# Altium PCB main_pcb.PcbDoc
Units mm, origin at the board's own origin, x right, y up, seen from the top; angles counter-clockwise.
Board outline 20 x 50 mm, 2 copper layers (Top Layer, Bottom Layer); 45 components, 28 nets, 164 pads, 32 vias.
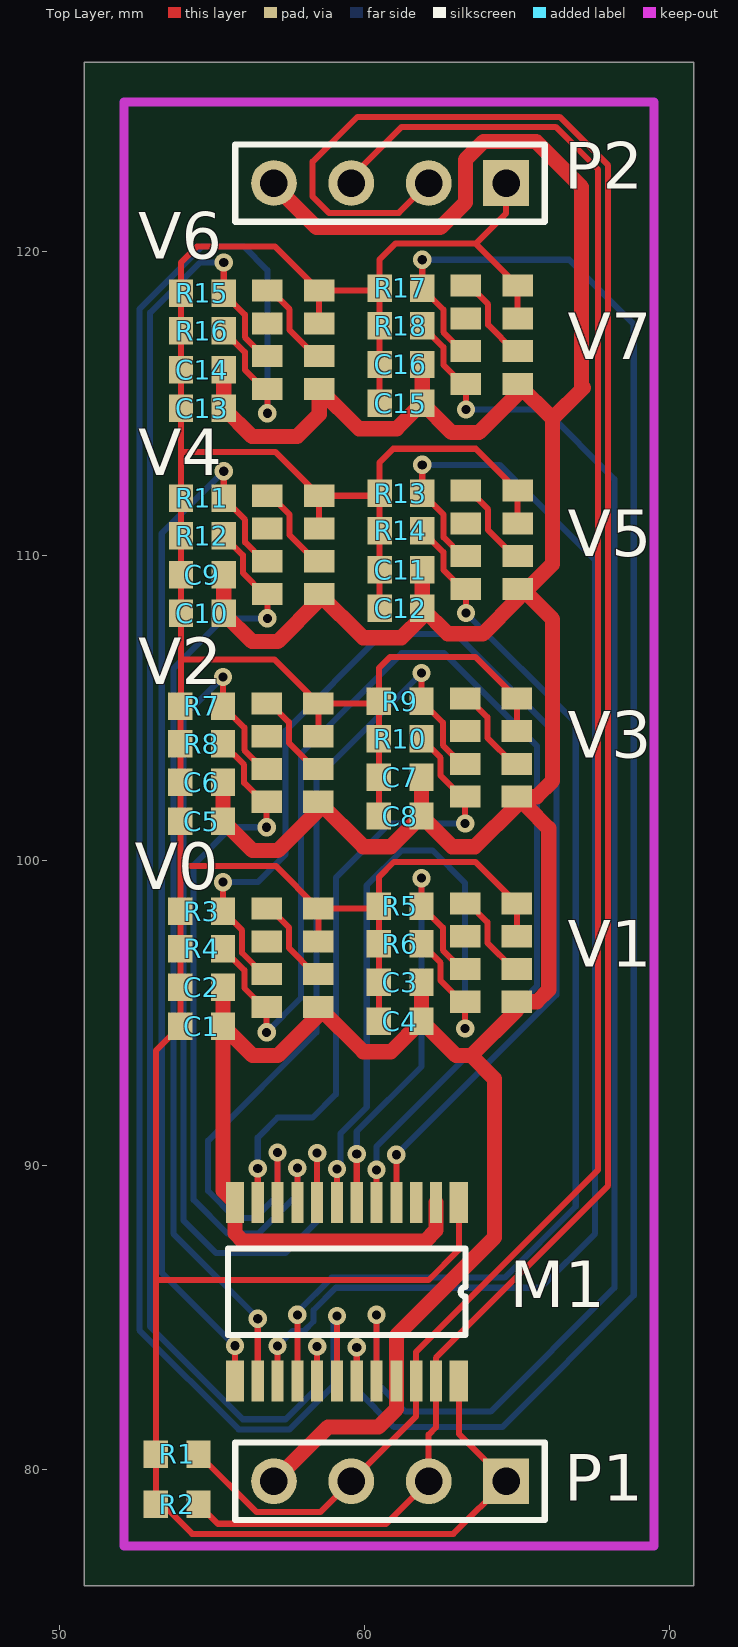
[diagram p0: Top Layer view]
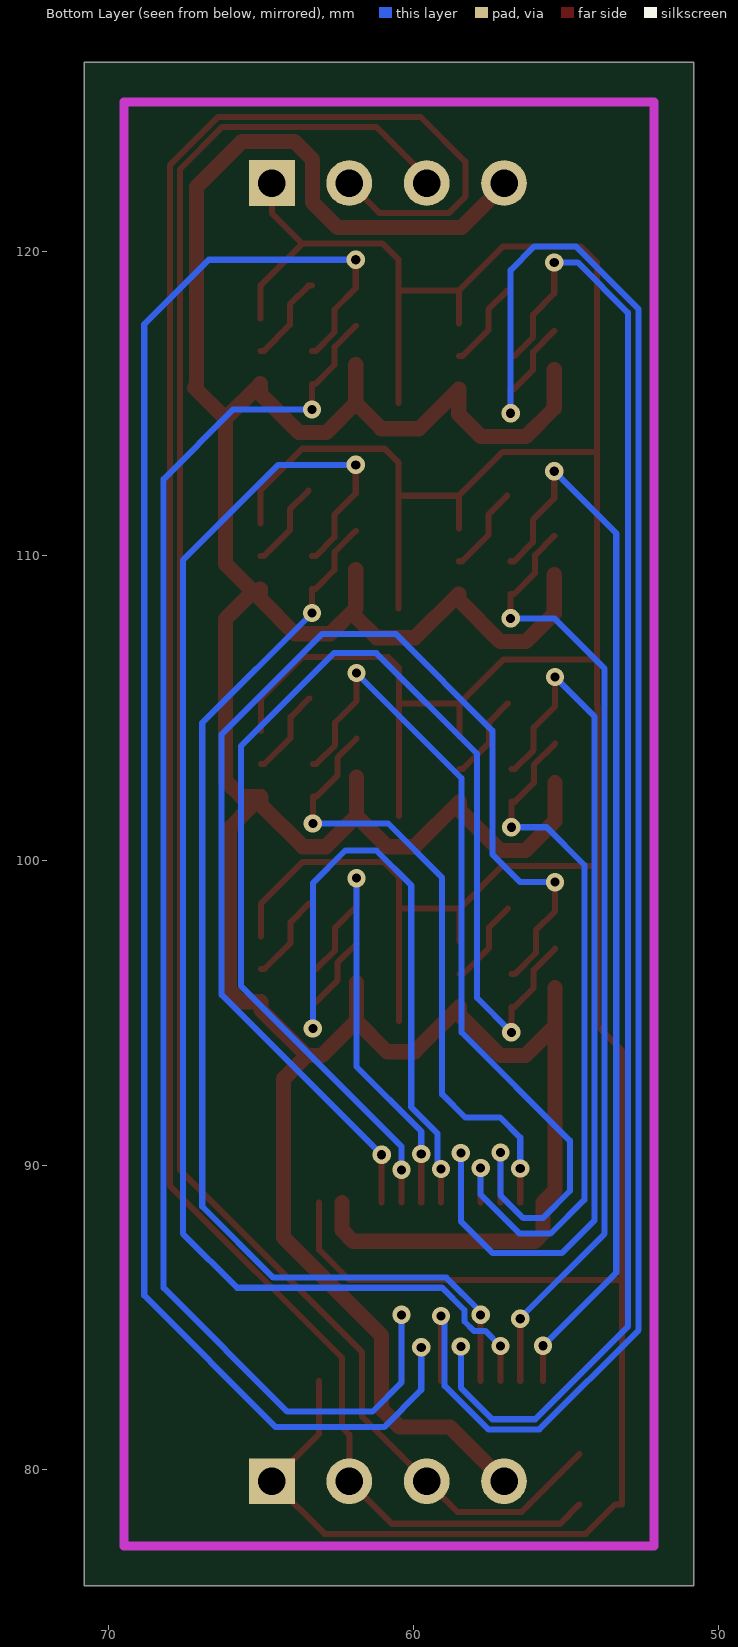
[diagram p1: Bottom Layer view, seen from below]

## Layer stack, top to bottom
Top Solder: solder mask 0.0102, Solder Resist, Dk 3.5
Top Layer: signal copper 0.0356
Dielectric 1: dielectric 0.32, FR-4, Dk 4.8
Bottom Layer: signal copper 0.0356
Bottom Solder: solder mask 0.0102, Solder Resist, Dk 3.5

## Board outline
50.8,76.2 70.8,76.2 70.8,126.2 50.8,126.2

## Design rules (kind name [scope] priority, off if disabled: settings)
Clearance [All] p1: gap=0.13
FabricationTestPointUsage TestPointUsage [All] p1: valid=0 allowmultiple=FALSE
FabricationTestpoint Testpoint [All] p1: side=3 testpointundercomponent=TRUE minsize=1.016 maxsize=2.54 preferedsize=1.524 minholesize=0 maxholesize=1.016 preferedholesize=0.813 testpointgrid=0.025 allowsidetop=TRUE allowsidebottom=TRUE usegrid=TRUE gridtolerance=0
HoleSize [All] p1: absolutevalues=TRUE maxlimit=3.9 minlimit=0.2 maxpercent=80.000 minpercent=20.000
HoleToHoleClearance [All] p1: gap=0.3 allowstackedmicrovias=TRUE
MinimumSolderMaskSliver [All] p1: minsoldermaskwidth=0.1
PlaneConnect [All] p1: planeconnectstyle=Relief reliefexpansion=0.5 reliefentries=4 reliefconductorwidth=0.4 reliefairgap=0.4
PolygonConnect [All] p1: connectstyle=Relief reliefconductorwidth=0.4 reliefentries=4 polygonreliefangle="90 Angle" airgapwidth=0.4
RoutingVias [All] p1: holewidth=0.3 width=0.6 viastyle="Through Hole" minholewidth=0.3 minwidth=0.6 maxholewidth=0.3 maxwidth=0.6
SilkToBoardRegionClearance UnpouredPolygon [All] p2:
SilkToSilkClearance [All] p1: silktosilkclearance=0
SilkToSolderMaskClearance SilkscreenOverComponentPads [IsPad] p1: minsilkscreentomaskgap=0 clearancetoexposedcopper=TRUE
SolderMaskExpansion [All] p1: expansion=-0.01
Width Power_Width [(InNet('5V') OR InNet('3V3') OR InNet('VCC') OR InNet('GND'))] p1: maxlimit=1 minlimit=0.4 preferedwidth=0.5 minimp=50.000000 maximp=50.000000 favimp=50.000000
Width [All] p2: maxlimit=0.2 minlimit=0.2 preferedwidth=0.2 minimp=50.000000 maximp=50.000000 favimp=50.000000
21 further rules are at their usual default settings.

## Components (designator, comment, footprint, x,y, rotation, side; value= is the part's Value field where it differs from the comment)
C1 "Cap" 1608[0603] 54.65,94.565 r180 top
C2 "Cap" 1608[0603] 54.65,95.835 r180 top
C3 "Cap" 1608[0603] 61.166,96.002 r180 top
C4 "Cap" 1608[0603] 61.166,94.732 r180 top
C5 "Cap" 1608[0603] 54.65,101.296 r180 top
C6 "Cap" 1608[0603] 54.65,102.566 r180 top
C7 "Cap" 1608[0603] 61.166,102.733 r180 top
C8 "Cap" 1608[0603] 61.166,101.463 r180 top
C9 "Cap" 1608[0603] 54.675,109.385 r180 top
C10 "Cap" 1608[0603] 54.675,108.115 r180 top
C11 "Cap" 1608[0603] 61.191,109.551 r180 top
C12 "Cap" 1608[0603] 61.191,108.281 r180 top
C13 "Cap" 1608[0603] 54.675,114.846 r180 top
C14 "Cap" 1608[0603] 54.675,116.116 r180 top
C15 "Cap" 1608[0603] 61.191,115.012 r180 top
C16 "Cap" 1608[0603] 61.191,116.282 r180 top
M1 "PCA9547" TSSOP24 62.992,88.773 r270 top
P1 "Header 4" HDR1X4 64.643,79.629 r180 top
P2 "Header 4" HDR1X4 64.643,122.237 r180 top
R1 "Res1" 1608[0603] 53.848,80.518 r180 top
R2 "Res1" 1608[0603] 53.848,78.867 r180 top
R3 "Res1" 1608[0603] 54.65,98.338 r180 top
R4 "Res1" 1608[0603] 54.65,97.105 r180 top
R5 "Res1" 1608[0603] 61.166,98.504 r180 top
R6 "Res1" 1608[0603] 61.166,97.272 r180 top
R7 "Res1" 1608[0603] 54.65,105.069 r180 top
R8 "Res1" 1608[0603] 54.65,103.836 r180 top
R9 "Res1" 1608[0603] 61.166,105.235 r180 top
R10 "Res1" 1608[0603] 61.166,104.003 r180 top
R11 "Res1" 1608[0603] 54.675,111.887 r0 top
R12 "Res1" 1608[0603] 54.675,110.654 r0 top
R13 "Res1" 1608[0603] 61.191,112.054 r180 top
R14 "Res1" 1608[0603] 61.191,110.821 r180 top
R15 "Res1" 1608[0603] 54.675,118.618 r0 top
R16 "Res1" 1608[0603] 54.675,117.385 r0 top
R17 "Res1" 1608[0603] 61.191,118.784 r0 top
R18 "Res1" 1608[0603] 61.191,117.552 r0 top
V0 "VCNL4040" SOP8 58.333,95.2 r180 top
V1 "VCNL4040" SOP8 64.849,95.367 r180 top
V2 "VCNL4040" SOP8 58.333,101.931 r180 top
V3 "VCNL4040" SOP8 64.849,102.098 r180 top
V4 "VCNL4040" SOP8 58.358,108.75 r180 top
V5 "VCNL4040" SOP8 64.874,108.916 r180 top
V6 "VCNL4040" SOP8 58.358,115.481 r180 top
V7 "VCNL4040" SOP8 64.874,115.647 r180 top

## Footprints (in the part's own frame and the unit in brackets; to place one, negate y for a bottom-side part, rotate by r counter-clockwise, add the part's x,y. Pads: shape width x height; smd on the part's side, far side on the other; paste and mask are expansions set on the pad)
1608[0603] [mm] "Chip Capacitor, Body 1.6x0.8mm, IPC High Density"
  rect 0.8x0.9 smd: 1(-0.7,0) 2(0.7,0)
  body extent -0.87,-0.48 0.87,0.48, height 1.3
HDR1X4 [mm] "Connector; Header; 4 Position"
  rect 1.5x1.5 hole 0.9: 1(0,0)
  round 1.5 hole 0.9: 2(2.54,0) 3(5.08,0) 4(7.62,0)
  silkscreen extent -1.27,-1.27 8.89,1.27
SOP8 [mm]
  rect 1x0.725 smd: 1(-0.15,0) 2(-0.15,-1.075) 3(-0.15,-2.15) 4(-0.15,-3.225) 5(1.55,-3.225) 6(1.55,-2.15) 7(1.55,-1.075) 8(1.55,0)
TSSOP24 [mm]
  rect 1.35x0.6 smd: 1(0,0.1) 12(0,-7.25) 13(5.85,-7.25) 24(5.85,0.1)
  rect 1.35x0.4 smd: 2(0,-0.65) 3(0,-1.3) 4(0,-1.95) 5(0,-2.6) 6(0,-3.25) 7(0,-3.9) 8(0,-4.55) 9(0,-5.2) 10(0,-5.85) 11(0,-6.5) 14(5.85,-6.5) 15(5.85,-5.85) 16(5.85,-5.2) 17(5.85,-4.55) 18(5.85,-3.9) 19(5.85,-3.25) 20(5.85,-2.6) 21(5.85,-1.95) 22(5.85,-1.3) 23(5.85,-0.65)
  silkscreen extent 1.51,-7.48 4.34,0.33

## Part data
C1 C2 C3 C4 C5 C6 C7 C8 C9 C10 C11 C12 C13 C14 C15 C16: "Capacitor"
P1 P2: "Header, 4-Pin"
R1 R2 R3 R4 R5 R6 R7 R8 R9 R10 R11 R12 R13 R14 R15 R16 R17 R18: "Resistor"
V0 V1 V2 V3 V4 V5 V6 V7: library part Component_1

## Via types
v1: diameter 0.6, hole 0.3, Top Layer to Bottom Layer, 32 vias

## Nets (pads, with @x,y where several pads share a name; then routed paths per layer and width w, separated by ;. In a path a pad name is that pad's centre, name@x,y a point inside that pad or via, vN(x,y) a via of type N, cw(c..) or ccw(c..) an arc to the next point about the centre after c; other vN are vias at no path point)
GND: C1.1 C2.1 C3.1 C4.1 C5.1 C6.1 C7.1 C8.1 C9.1 C10.1 C11.1 C12.1 C13.1 C14.1 C15.1 C16.1 M1.2 M1.12 M1.21 P1.4 P2.4 V0.1 V1.1 V2.1 V3.1 V4.1 V5.1 V6.1 V7.1 | length 140.3
  Top Layer w0.254: C12.1@61.891,107.992 C12.1
  Top Layer w0.5: C2.1 C1.1 ; C6.1 C5.1 56.316,100.33 57.15,100.33 58.483,101.663 V2.1 59.957,100.457 60.861,100.457 C8.1 ; C9.1 C10.1 56.302,107.188 57.15,107.188 58.508,108.546 V4.1 59.943,107.315 61.214,107.315 C12.1@61.891,107.992 ; C14.1 C13.1 56.302,113.919 57.785,113.919 58.508,114.642 V6.1 59.816,114.173 61.052,114.173 C15.1 ; P2.4@56.959,122.237 58.42,120.777 62.484,120.777 63.309,121.602 63.309,123.005 63.904,123.599 65.631,123.599 67.12,122.111 67.12,115.584 ; P1.4 58.801,81.407 60.452,81.407 61.042,81.997 M1.21 61.042,84.41 64.262,87.63 64.262,92.837 63.5,93.599 ; C3.1 C4.1 ; C7.1 C8.1 ; C11.1 C12.1 62.73,107.442 63.881,107.442 65.024,108.585 V5.1 ; C16.1 C15.1 ; M1.2 62.342,87.869 61.976,87.503 56.007,87.503 55.742,87.768 M1.12 55.35,89.165 C1.1 ; V1.1 64.999,95.098 63.5,93.599 ; V1.1@65.15,95.367 65.649,95.367 66.04,95.758 66.04,101.057 V3.1@65.324,101.773 ; 67.183,115.52 66.167,114.504 ; C1.1 56.316,93.599 57.15,93.599 58.483,94.932 V0.1 59.957,93.726 60.861,93.726 C4.1 ; C4.1 62.999,93.599 63.5,93.599 ; C8.1 62.872,100.457 63.627,100.457 64.999,101.829 V3.1 65.649,102.098 66.167,102.616 66.167,107.924 65.265,108.826 66.167,109.728 66.167,114.504 ; C15.1 62.857,114.046 63.754,114.046 65.024,115.316 V7.1 66.167,114.504
NetC1_2: C1.2 C2.2 C3.2 C4.2 C5.2 C6.2 C7.2 C8.2 C9.2 C10.2 C11.2 C12.2 C13.2 C14.2 C15.2 C16.2 M1.1 M1.24 P1.1 P2.1 R1.2 R2.2 R3.2 R4.2 R5.2 R6.2 R7.2 R8.2 R9.2 R10.2 R11.1 R12.1 R13.2 R14.2 R15.1 R16.1 R17.1 R18.1 V0.3 V0.4 V1.3 V1.4 V2.3 V2.4 V3.3 V3.4 V4.3 V4.4 V5.3 V5.4 V6.3 V6.4 V7.3 V7.4 | length 149.1
  Top Layer w0.2: 53.95,99.822 57.086,99.822 V0.4 ; V0.3 V0.4 ; V2.3 V2.4 ; V4.3 V4.4 ; V6.3 V6.4 ; R5.2@60.387,98.425 V0.4 ; R9.2@60.387,105.156 V2.4 ; R13.2@60.412,111.975 V4.4 ; R17.1@60.412,118.706 V6.4 ; C4.2 C3.2 R6.2 R5.2 60.466,99.455 60.965,99.954 63.637,99.954 V1.4 V1.3 ; C8.2 C7.2 R10.2 R9.2 60.466,106.313 60.838,106.685 63.637,106.685 V3.4 V3.3 ; C12.2 C11.2 R14.2 R13.2 60.491,113.069 60.94,113.518 63.647,113.518 V5.4 V5.3 ; C15.2 C16.2 R18.1 R17.1 60.491,119.733 61.007,120.249 63.647,120.249 ; M1.24 63.092,81.18 P1.1 62.916,77.902 54.338,77.902 53.373,78.867 R2.2 R1.2 53.148,86.233 ; M1.1 63.092,87.222 62.103,86.233 53.148,86.233 ; P2.1 64.643,121.245 63.647,120.249 ; V7.3 V7.4 63.647,120.249 ; 53.148,86.233 53.148,93.763 C1.2 C2.2 R4.2 R3.2 53.95,99.822 C5.2 C6.2 R8.2 R7.2 53.975,105.093 53.975,106.604 ; 53.975,106.604 C10.2 C9.2 R12.1 R11.1 53.975,113.411 ; 53.975,106.604 57.035,106.604 V2.4 ; 53.975,113.411 C13.2 C14.2 R16.1 R15.1 53.975,119.634 54.502,120.161 57.053,120.161 V6.4 ; 53.975,113.411 57.072,113.411 V4.4
NetM1_4: M1.4 R3.1 V0.7 | length 39.3
  Top Layer w0.2: v1(55.35,99.292) R3.1 55.98,97.707 55.98,96.965 56.67,96.275 V0.7 ; M1.4 v1(61.042,90.342)
  Bottom Layer w0.2: v1(55.35,99.292) 56.493,99.292 57.404,100.203 57.404,104.267 60.579,107.442 62.992,107.442 66.294,104.14 66.294,95.594 v1(61.042,90.342)
NetM1_5: M1.5 R4.1 V0.8 | length 40.6
  Top Layer w0.2: R4.1 56.053,96.402 56.053,95.817 56.67,95.2 V0.8 v1(56.783,94.361) ; M1.5 v1(60.392,89.849)
  Bottom Layer w0.2: v1(56.783,94.361) 57.912,95.49 57.912,103.505 61.214,106.807 62.611,106.807 65.659,103.759 65.659,95.885 60.392,90.618 v1(60.392,89.849)
NetM1_6: M1.6 R5.1 V1.7 | length 15.2
  Top Layer w0.2: M1.6 v1(59.742,90.372) ; v1(61.866,99.424) R5.1 62.569,97.801 62.569,97.059 63.186,96.442 V1.7
  Bottom Layer w0.2: v1(59.742,90.372) 59.742,91.111 61.866,93.235 v1(61.866,99.424)
NetM1_7: M1.7 R6.1 V1.8 | length 23.2
  Top Layer w0.2: M1.7 v1(59.092,89.879) ; R6.1@61.866,97.269 62.496,96.639 62.496,96.057 63.186,95.367 V1.8 v1(63.299,94.488)
  Bottom Layer w0.2: v1(59.092,89.879) 59.212,89.999 59.212,91.048 60.071,91.907 60.071,99.187 61.214,100.33 62.23,100.33 63.299,99.261 v1(63.299,94.488)
NetM1_8: M1.8 R7.1 V2.7 | length 31.2
  Top Layer w0.2: v1(55.35,106.023) R7.1 56.053,104.366 56.053,103.623 56.67,103.006 V2.7 ; M1.8 v1(58.442,90.402)
  Bottom Layer w0.2: v1(55.35,106.023) 54.058,104.731 54.058,88.182 55.118,87.122 57.404,87.122 58.442,88.16 v1(58.442,90.402)
NetM1_9: M1.9 R8.1 V2.8 | length 23.7
  Top Layer w0.2: R8.1 56.047,103.139 56.047,102.554 56.67,101.931 V2.8 v1(56.783,101.092) ; M1.9 v1(57.792,89.909)
  Bottom Layer w0.2: v1(56.783,101.092) 55.626,101.092 54.388,99.854 54.388,88.868 55.499,87.757 56.515,87.757 57.792,89.034 v1(57.792,89.909)
NetM1_10: M1.10 R9.1 V3.7 | length 29.5
  Top Layer w0.2: M1.10 v1(57.142,90.416) ; v1(61.866,106.155) R9.1 62.569,104.532 62.569,103.79 63.186,103.173 V3.7
  Bottom Layer w0.2: v1(57.142,90.416) 57.142,89.019 56.388,88.265 55.753,88.265 54.864,89.154 54.864,90.805 58.42,94.361 58.42,102.709 v1(61.866,106.155)
NetM1_11: M1.11 R10.1 V3.8 | length 20.8
  Top Layer w0.2: M1.11 v1(56.492,89.893) ; R10.1 62.496,103.373 62.496,102.788 63.186,102.098 V3.8 v1(63.299,101.219)
  Bottom Layer w0.2: v1(56.492,89.893) 56.492,90.909 57.15,91.567 58.293,91.567 59.055,92.329 59.055,99.441 60.833,101.219 v1(63.299,101.219)
NetM1_13: M1.13 R11.2 V4.7 | length 35.3
  Top Layer w0.2: v1(55.375,112.776) R11.2 56.078,111.184 56.078,110.442 56.695,109.825 V4.7 ; M1.13 v1(55.742,84.074)
  Bottom Layer w0.2: v1(55.375,112.776) 53.34,110.741 53.34,86.476 v1(55.742,84.074)
NetM1_14: M1.14 R12.2 V4.8 | length 31.6
  Top Layer w0.2: R12.2 56.005,110.024 56.005,109.44 56.695,108.75 V4.8 v1(56.808,107.95) ; M1.14 v1(56.492,84.963)
  Bottom Layer w0.2: v1@56.492,84.986 53.721,87.757 53.721,106.299 55.372,107.95 v1(56.808,107.95)
NetM1_15: M1.15 R13.1 V5.7 | length 46
  Top Layer w0.2: M1.15 v1(57.142,84.066) ; v1(61.891,112.988) R13.1 62.594,111.35 62.594,110.608 63.211,109.991 V5.7
  Bottom Layer w0.2: v1(57.142,84.066) 57.636,84.56 58.012,84.56 58.322,84.87 58.322,85.246 59.055,85.979 65.786,85.979 67.564,87.757 67.564,109.855 64.431,112.988 v1(61.891,112.988)
NetM1_16: M1.16 R14.1 V5.8 | length 37.1
  Top Layer w0.2: M1.16 v1(57.792,85.09) ; R14.1 62.588,110.124 62.588,109.539 63.211,108.916 V5.8 v1(63.324,108.126)
  Bottom Layer w0.2: v1@57.792,85.183 58.918,86.309 64.592,86.309 66.929,88.646 66.929,104.521 v1(63.324,108.126)
NetM1_17: M1.17 R15.2 V6.7 | length 49.8
  Top Layer w0.2: v1(55.375,119.631) R15.2 56.072,117.921 56.072,117.179 56.695,116.556 V6.7 ; M1.17 v1(58.442,84.052)
  Bottom Layer w0.2: v1(55.375,119.631) 54.607,119.631 52.959,117.983 52.959,84.703 56.001,81.661 57.404,81.661 58.442,82.699 v1(58.442,84.052)
NetM1_18: M1.18 R16.2 V6.8 | length 59.7
  Top Layer w0.2: R16.2 56.072,116.688 56.072,116.104 56.695,115.481 V6.8 v1(56.808,114.681) ; M1.18 v1(59.092,85.053)
  Bottom Layer w0.2: v1(56.808,114.681) 56.808,119.379 56.026,120.161 54.667,120.161 52.607,118.101 52.607,84.588 55.864,81.331 57.541,81.331 58.972,82.762 v1@58.972,85.053
NetM1_19: M1.19 R17.2 V7.7 | length 57.2
  Top Layer w0.2: M1.19 v1(59.742,84.022) ; v1(61.891,119.719) R17.2 62.588,118.088 62.588,117.345 63.211,116.722 V7.7
  Bottom Layer w0.2: v1(59.742,84.022) 59.742,82.625 60.96,81.407 64.516,81.407 68.834,85.725 68.834,117.602 66.717,119.719 v1(61.891,119.719)
NetM1_20: M1.20 R18.2 V7.8 | length 50
  Top Layer w0.2: M1.20 v1(60.392,85.09) ; R18.2 62.588,116.855 62.588,116.27 63.211,115.647 V7.8 v1(63.324,114.808)
  Bottom Layer w0.2: v1(60.392,85.09) 60.392,82.864 61.341,81.915 64.135,81.915 68.199,85.979 68.199,112.522 65.913,114.808 v1(63.324,114.808)
NetM1_22: M1.22 P1.3 P2.3 R1.1 | length 62.2
  Top Layer w0.2: R1.1 56.453,78.613 58.547,78.613 P1.3 61.692,81.758 M1.22 61.692,83.873 67.663,89.844 67.663,122.682 66.266,124.079 61.214,124.079 59.563,122.428 P2.3
NetM1_23: M1.23 P1.2 P2.2 R2.1 | length 70.6
  Top Layer w0.2: R2.1 55.183,78.232 60.706,78.232 P1.2 62.103,81.153 62.342,81.392 M1.23 62.342,83.678 67.993,89.329 67.993,122.819 66.403,124.409 59.766,124.409 58.293,122.936 58.293,121.793 58.829,121.257 61.122,121.257 P2.2
NetV0_2: V0.2 V0.5 | length 2.9
  Top Layer w0.2: V0.5@56.896,98.425 57.513,97.808 57.513,97.132 58.37,96.275 V0.2
NetV1_2: V1.2 V1.5 | length 3
  Top Layer w0.2: V1.5 63.412,98.592 64.029,97.974 64.029,97.299 64.886,96.442 V1.2
NetV2_2: V2.2 V2.5 | length 2.9
  Top Layer w0.2: V2.5@56.896,105.156 57.513,104.539 57.513,103.863 58.37,103.006 V2.2
NetV3_2: V3.2 V3.5 | length 2.9
  Top Layer w0.2: V3.5@63.412,105.323 64.029,104.705 64.029,104.03 64.886,103.173 V3.2
NetV4_2: V4.2 V4.5 | length 2.9
  Top Layer w0.2: V4.5@56.921,111.975 57.538,111.357 57.538,110.682 58.395,109.825 V4.2
NetV5_2: V5.2 V5.5 | length 2.9
  Top Layer w0.2: V5.5@63.437,112.141 64.054,111.524 64.054,110.848 64.911,109.991 V5.2
NetV6_2: V6.2 V6.5 | length 2.9
  Top Layer w0.2: V6.5@56.921,118.706 57.538,118.088 57.538,117.413 58.395,116.556 V6.2
NetV7_2: V7.2 V7.5 | length 3
  Top Layer w0.2: V7.5 63.437,118.872 64.054,118.255 64.054,117.579 64.911,116.722 V7.2
pads on no net: M1.3 V0.6 V1.6 V2.6 V3.6 V4.6 V5.6 V6.6 V7.6

## Keep-outs
Keep-Out Layer:
  lines w0.3: 52.1,77.5 52.1,124.9 69.5,124.9 69.5,77.5 52.1,77.5

## Silkscreen, mask and mechanical layers (free items; w line width, h text height)
Drill Drawing:
  text ".LEGEND" at 75.88,81.28 h1.52
  text "Drill Drawing." at 75.88,78.74 h1.52

## Dimensions
52.1,77.5 to 52.1,124.9 on Mechanical 1
52.1,77.5 to 69.5,77.5 on Mechanical 1